# Altium PCB TallyLight2.PcbDoc
Units mm, origin at the board's own origin, x right, y up, seen from the top; angles counter-clockwise.
Board outline 66 x 74 mm, 2 copper layers (Top Layer, Bottom Layer), stack 1.571 mm thick; 19 components, 15 nets, 83 pads, 7 vias.
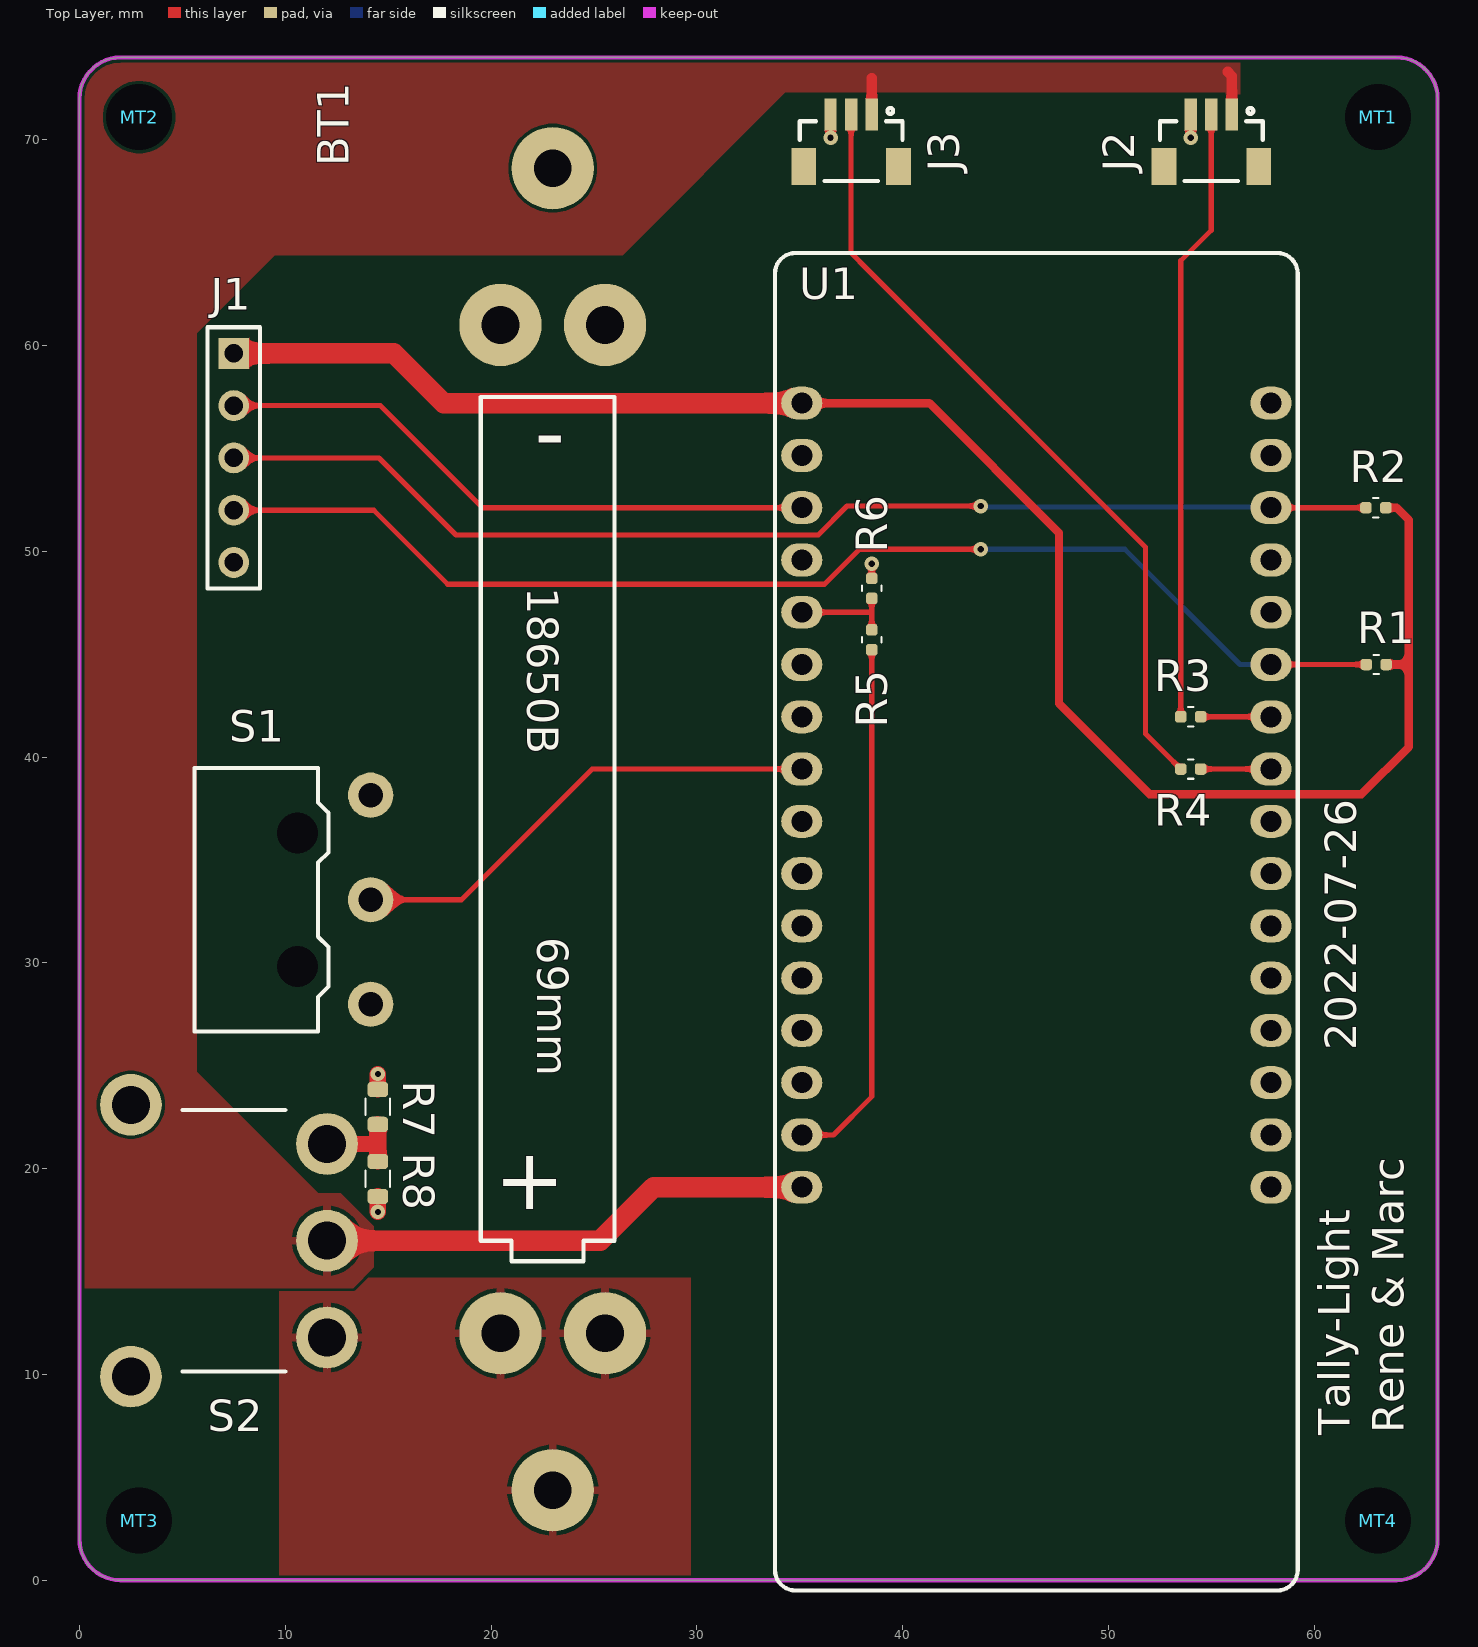
[diagram p0: Top Layer view]
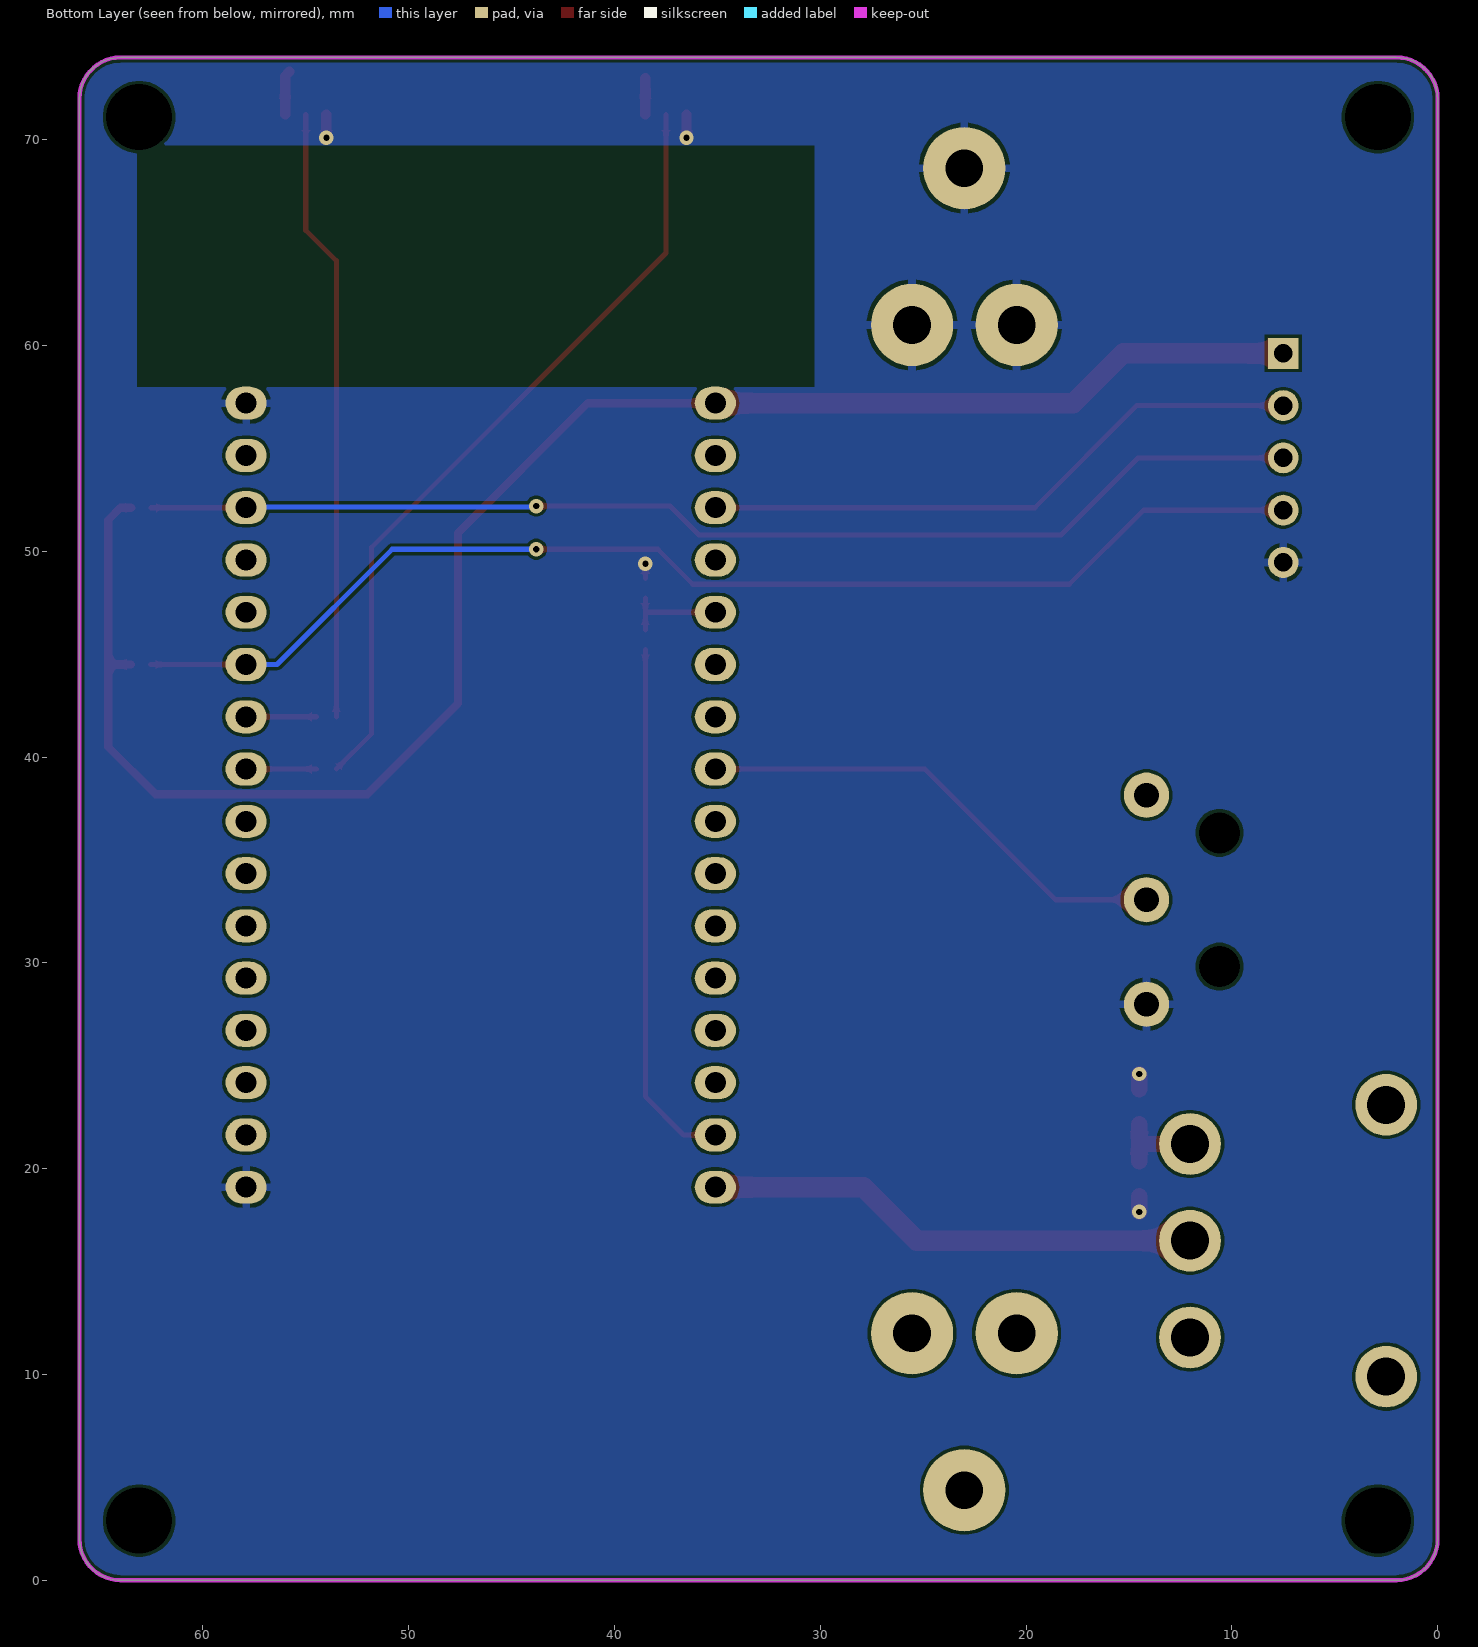
[diagram p1: Bottom Layer view, seen from below]

## Layer stack, top to bottom
Top Solder: solder mask 0.0102, Solder Resist, Dk 3.5
Top Layer: signal copper 0.0356
Dielectric 1: dielectric 1.5, FR-4, Dk 4.8
Bottom Layer: signal copper 0.0356
Bottom Solder: solder mask 0.0102, Solder Resist, Dk 3.5

## Board outline
2,0 cw(c2,2) 0,2 0,72 cw(c2,72) 2,74 64,74 cw(c64,72) 66,72 66,2 cw(c64,2) 64,0

## Design rules (kind name [scope] priority, off if disabled: settings)
Clearance [All] p1: gap=0.15 ignorepadtopadclearanceinfootprint=FALSE
HoleSize [All] p1: absolutevalues=TRUE maxlimit=3.5 minlimit=0.025 maxpercent=80.000 minpercent=20.000
MinimumSolderMaskSliver [All] p1 off: minsoldermaskwidth=0.07
PolygonConnect PolygonConnect_1 [isvia] p1: connectstyle=Direct reliefconductorwidth=0.254 reliefentries=4 polygonreliefangle="90 Angle" airgapwidth=0.254
PolygonConnect [All] p2: connectstyle=Relief reliefconductorwidth=0.4 reliefentries=4 polygonreliefangle="90 Angle" airgapwidth=0.2
RoutingVias [All] p1: holewidth=0.3 width=0.7 viastyle="Through Hole" minholewidth=0.3 minwidth=0.7 maxholewidth=0.3 maxwidth=0.7
SilkToSilkClearance [All] p1: silktosilkclearance=0.1
SilkToSolderMaskClearance [IsPad] p1: minsilkscreentomaskgap=0.1 clearancetoexposedcopper=TRUE
SolderMaskExpansion [All] p1: expansion=0.1 istentingtop=FALSE
Width [All] p1: maxlimit=1 minlimit=0.15 preferedwidth=0.25
26 further rules are at their usual default settings.

## Components (designator, comment, footprint, x,y, rotation, side; value= is the part's Value field where it differs from the comment)
BT1 "Battery" BAT18650B 23,36.5 r180 top locked
J1 "Header 5" HDR1X5 7.5,59.62 r270 top
J2 "BM03B-SRSS-TB" BM03B-SRSS-TB 55,68 r180 top
J3 "BM03B-SRSS-TB" BM03B-SRSS-TB 37.5,68 r180 top
MT1 "Mount 3.2mm" MT 63.1,71.1 r0 top
MT2 "Mount 3.2mm" MT 2.9,71.1 r0 top
MT3 "Mount 3.2mm" MT 2.9,2.9 r0 top
MT4 "Mount 3.2mm" MT 63.1,2.9 r0 top
R1 "1.5k" R0402 63.017,44.5 r0 top
R2 "1.5k" R0402 63,52.12 r0 top
R3 "470E" R0402 54,41.96 r0 top
R4 "470E" R0402 54,39.42 r0 top
R5 "10k" R0402 38.5,45.7 r270 top
R6 "20k" R0402 38.5,48.2 r270 top
R7 "10E" R0603 14.5,23 r270 top
R8 "10E" R0603 14.5,19.5 r90 top
S1 "SS075Q102F035V2A" SS075Q102F035V2A 0.8,41.87 r0 top
S2 "500SSP1S2M6REA" 500SSPxS2M6xEA 2.5,16.5 r0 top locked
U1 "LolinD32Pro" LolinD32Pro 46.5,-0.5 r0 top locked

## Footprints (in the part's own frame and the unit in brackets; to place one, negate y for a bottom-side part, rotate by r counter-clockwise, add the part's x,y. Pads: shape width x height; smd on the part's side, far side on the other; paste and mask are expansions set on the pad)
500SSPxS2M6xEA [mm]
  round 3 hole 1.85: 0(0,-6.605) 0(0,6.605) 1(9.53,4.7) 2(9.53,0) 3(9.53,-4.7)
  silkscreen extent 2.5,-6.35 7.5,6.35, body extent -8.25,-6.79 10.16,6.79, height 6.6
BAT18650B [mm]
  round 4 hole 1.83: 1(-2.54,24.5) 1(0,32.12) 1(2.54,24.5) 2(-2.54,-24.5) 2(0,-32.12) 2(2.54,-24.5)
  silkscreen extent -3,-21 3.5,21, body extent -9.15,-35.51 9.15,35.51, height 18.65
BM03B-SRSS-TB [mm]
  rect 1.2x1.8 smd: 0(-2.3,-0.7) 0(2.3,-0.7)
  rect 0.6x1.55 smd: 1(-1,-3.225) 2(0,-3.225) 3(1,-3.225)
  silkscreen extent -2.5,-3.54 2.5,0, body extent -2.5,-3.6 2.5,0, height 4.25
HDR1X5 [mm] "Connector; Header; 5 Position"
  rect 1.5x1.5 hole 0.9: 1(0,0)
  round 1.5 hole 0.9: 2(2.54,0) 3(5.08,0) 4(7.62,0) 5(10.16,0)
  silkscreen extent -1.27,-1.27 11.43,1.27
LolinD32Pro [mm]
  oval 2x1.6 hole 1.02: A1(-11.4,57.7) A2(-11.4,55.16) A3(-11.4,52.62) A4(-11.4,50.08) A5(-11.4,47.54) A6(-11.4,45) A7(-11.4,42.46) A8(-11.4,39.92) A9(-11.4,37.38) A10(-11.4,34.84) A11(-11.4,32.3) A12(-11.4,29.76) A13(-11.4,27.22) A14(-11.4,24.68) A15(-11.4,22.14) A16(-11.4,19.6) B1(11.4,57.7) B2(11.4,55.16) B3(11.4,52.62) B4(11.4,50.08) B5(11.4,47.54) B6(11.4,45) B7(11.4,42.46) B8(11.4,39.92) B9(11.4,37.38) B10(11.4,34.84) B11(11.4,32.3) B12(11.4,29.76) B13(11.4,27.22) B14(11.4,24.68) B15(11.4,22.14) B16(11.4,19.6)
  silkscreen extent -12.7,0 12.7,65, body extent -12.7,0 12.7,65, height 17.5
MT [mm]
  round 0 hole 3.2 unplated: 15(0,0)
R0402 [mil] "R0402"
  rrect50% 22x22 smd: 1(-19,0) 2(19,0)
  silkscreen extent -5,-19 5,19, body extent -20,-10 20,10, height 12
R0603 [mm] "C0603"
  rrect50% 0.75x1 smd: 1(-0.85,0) 2(0.85,0)
  silkscreen extent -0.4,-0.6 0.4,0.6, body extent -0.8,-0.4 0.8,0.4, height 0.45
SS075Q102F035V2A [mm]
  round 2.2 hole 1.2: 1(13.35,-13.88) 2(13.35,-8.8) 3(13.35,-3.72)
  round 0 hole 2: 14(9.8,-12.05) 14(9.8,-5.55)
  silkscreen extent 4.8,-15.2 11.3,-2.4, body extent 1.78,-15.22 13.5,1.88, height 5.77

## Part data
BT1: "Multicell Battery", LatestRevisionDate=17-Jul-2002, LatestRevisionNote="Re-released for DXP Platform.", PackageDescription="Battery; 2 Leads", PackageReference=BAT-2, Published=24-Mar-1999, Publisher="Altium Limited"
J1: "Header, 5-Pin", LatestRevisionDate=17-Jul-2002, LatestRevisionNote="Re-released for DXP Platform.", Publisher="Altium Limited"
J2 J3: library part "Header 3", "Header, 3-Pin", LatestRevisionDate=17-Jul-2002, LatestRevisionNote="Re-released for DXP Platform.", Publisher="Altium Limited"
MT1 MT2 MT3 MT4: library part MountingHole, "Mounting hole 3.2mm, 5.7mm pad", Fitted="Not Fitted"
R1 R2 R3 R4 R5 R6 R7 R8: library part "RES 0402", "RES 200 KOHM 1/10W 1% 0402 SMD", Manufacturer=Panasonic, Manufacturer Part Number=ERJ-2RKF2003X, Fitted=Fitted
S1: library part SW-PB, "Switch", LatestRevisionDate=17-Jul-2002, LatestRevisionNote="Re-released for DXP Platform.", PackageDescription="Switch; 2 Leads", PackageReference=SPST-2, Published=24-Mar-1999, Publisher="Altium Limited"
S2: library part SW-SPDT, "SPDT Subminiature Toggle Switch, Right Angle Mounting, Vertical Actuation", ComponentLink1Description="Manufacturer Link", ComponentLink1URL=http://www.apem.com, DatasheetVersion=05-Dec-2000, LatestRevisionDate=17-Dec-2003, LatestRevisionNote="Schematic revised, PCB Footprint replaced.", PackageDescription="Switch; 4 Leads", PackageReference=TL36WW15050, Published=24-Mar-1999, Publisher="Altium Limited"

## Via types
v1: diameter 0.7, hole 0.3, Top Layer to Bottom Layer, tented top, 7 vias

## Nets (pads, with @x,y where several pads share a name; then routed paths per layer and width w, separated by ;. In a path a pad name is that pad's centre, name@x,y a point inside that pad or via, vN(x,y) a via of type N, cw(c..) or ccw(c..) an arc to the next point about the centre after c; other vN are vias at no path point)
+3.3V: J1.1 R1.2 R2.2 U1.A1 | length 85.3
  Top Layer w0.4: U1.A1 41.3,57.2 47.6,50.9 47.6,42.6 52,38.2 62.3,38.2 64.6,40.5 64.6,44.5 ; R2.2 64.001,52.12 64.6,51.521 64.6,44.5 ; R1.2 64.6,44.5
  Top Layer w1: J1.1 15.28,59.62 17.7,57.2 U1.A1
GND: BT1.2 J1.5 J2.3 J3.3 R6.1 R7.1 R8.1 S1.1 U1.B1 U1.B16 | length 4.5
  Top Layer w0.25: R6.1 v1(38.5,49.4)
  Top Layer w0.5: v1(36.5,70.1) J3.3 ; v1(54,70.1) J2.3
  Top Layer w0.8: v1(14.5,17.9) R8.1 ; R7.1 v1(14.5,24.6)
NetBT1_1: BT1.1 S2.3
NetJ1_2: J1.2 U1.A3 | length 29.7
  Top Layer w0.25: J1.2 14.62,57.08 19.58,52.12 U1.A3
NetJ1_3: J1.3 R2.1 U1.B3 | length 57.2
  Top Layer w0.25: J1.3 14.56,54.54 18.3,50.8 35.9,50.8 37.3,52.2 v1(43.8,52.2) ; U1.B3 R2.1
  Bottom Layer w0.25: v1(43.8,52.2) 43.84,52.16 57.86,52.16 U1.B3
NetJ1_4: J1.4 R1.1 U1.B6 | length 59.5
  Top Layer w0.25: J1.4 14.3,52 17.9,48.4 36.2,48.4 37.9,50.1 v1(43.8,50.1) ; U1.B6 R1.1
  Bottom Layer w0.25: v1(43.8,50.1) 50.8,50.1 56.4,44.5 U1.B6
NetJ2_2: J2.2 R3.1 | length 29.9
  Top Layer w0.25: R3.1 53.517,64.117 55,65.6 J2.2
NetJ3_2: J3.2 R4.1 | length 38.4
  Top Layer w0.25: J3.2 37.5,64.5 38.3,63.7 51.8,50.2 51.8,41.137 R4.1
NetR3_2: R3.2 U1.B7 | length 3.4
  Top Layer w0.25: R3.2 U1.B7
NetR4_2: R4.2 U1.B8 | length 3.4
  Top Layer w0.25: R4.2 U1.B8
NetR5_2: R5.2 U1.A15 | length 25.9
  Top Layer w0.25: U1.A15 36.64,21.64 38.5,23.5 R5.2
NetR7_2: R7.2 R8.2 S2.1 | length 4.3
  Top Layer w0.8: S2.1 14.45,21.2 14.5,21.25 ; R8.2 14.5,21.25 ; R7.2 14.5,21.25
NetS1_2: S1.2 U1.A8 | length 23.6
  Top Layer w0.25: S1.2 18.57,33.07 24.92,39.42 U1.A8
VBAT_SW: J2.1 J3.1 S2.2 U1.A16 | length 28.1
  Top Layer w0.5: J3.1 38.5,73 ; 55.8,73.3 56,73.1 J2.1
  Top Layer w1: S2.2 25.3,16.5 27.9,19.1 U1.A16
VBUS_Mon: R5.1 R6.2 U1.A5 | length 5
  Top Layer w0.25: U1.A5 38.41,47.04 38.5,46.95 ; R5.1 38.5,46.95 ; R6.2 38.5,46.95
pads on no net: J2.0 J3.0 MT1.15 MT2.15 MT3.15 MT4.15 S1.3 S1.14 S2.0 U1.A2 U1.A4 U1.A6 U1.A7 U1.A9 U1.A10 U1.A11 U1.A12 U1.A13 U1.A14 U1.B2 U1.B4 U1.B5 U1.B9 U1.B10 U1.B11 U1.B12 U1.B13 U1.B14 U1.B15

## Polygon pours and split planes (outlines as drawn)
VBAT_SW on Top Layer "VBAT_SW_L01_P000" (solid, pour order 0): 11.6,18.8 12.7,18.8 14.3,17.2 14.3,15.2 13.3,14.2 0,14.2 0,73 1,74 56.4,74 56.4,72 56.2,71.8 55.8,71.8 55.7,71.9 55.7,72.3 34.3,72.3 26.4,64.4 9.5,64.4 5.7,60.6 5.7,24.7
NetBT1_1 on Top Layer "NETBT1_1_L01_P001" (solid, pour order 1): 9.7,14.7 29.7,14.7 29.7,0 9.7,0
GND on Bottom Layer "GND_L02_P002" (solid, pour order 2): 0,72.6 1.4,74 65,74 66,73 66,1.1 64.9,0 1.3,0 0,1.3

## Keep-outs
Keep-Out Layer:
  the board outline again, w0.2

## Other copper
Bottom Layer:
  pour cut-out: 30.3,58 63.2,58 63.2,69.7 30.3,69.7

## Silkscreen, mask and mechanical layers (free items; w line width, h text height)
Top Overlay:
  text "2022-07-26" at 62.046,25.754 h1.52 r90
  text "Rene & Marc" at 64.346,7.154 h1.52 r90
  text "Tally-Light" at 61.738,7.054 h1.52 r90
Mechanical 1:
  lines w0.2: -2.1,3 -2.1,50 ; -0.5,4 -0.5,45 ; 32.5,58 60.5,58 60.5,70.5 32.5,70.5 32.5,58
Drill Drawing:
  circle w0.254: c82.421,15.181 r0.847
  lines w0.2: 0,2 ccw(c2,2) 2,0 64,0 ccw(c64,2) 66,2 66,72 ccw(c64,72) 64,74 2,74 ccw(c2,72) 0,72 0,2
  lines w0.254: 81.574,8.407 83.268,8.407 82.421,6.714 81.574,8.407 ; 81.574,10.524 81.574,10.947 81.998,11.371 81.574,11.794 81.574,12.217 81.998,12.217 82.421,11.794 82.844,12.217 83.268,12.217 83.268,11.794 82.844,11.371 83.268,10.947 83.268,10.524 82.844,10.524 82.421,10.947 81.998,10.524 81.574,10.524 ; 81.574,18.144 82.421,18.567 83.268,18.144 82.844,18.991 83.268,19.837 82.421,19.414 81.574,19.837 81.998,18.991 81.574,18.144 ; 81.574,22.377 81.998,22.377 81.998,21.954 82.844,21.954 82.844,22.377 83.268,22.377 83.268,23.224 82.844,23.224 82.844,23.647 81.998,23.647 81.998,23.224 81.574,23.224 81.574,22.377 ; 81.574,26.187 81.998,26.187 82.421,25.764 82.844,26.187 83.268,26.187 82.844,26.611 83.268,27.034 82.844,27.034 82.421,27.457 81.998,27.034 81.574,27.034 81.998,26.611 81.574,26.187 ; 81.574,29.574 83.268,29.574 83.268,31.267 81.574,31.267 81.574,29.574 ; 81.574,34.231 82.421,33.384 83.268,34.231 82.421,35.077 81.574,34.231
  lines w0.381: 80.056,5.571 267.507,5.571 ; 80.056,36.051 267.507,36.051 ; 94.048,1.761 94.048,39.861 ; 107.76,1.761 107.76,39.861 ; 136.962,1.761 136.962,39.861 ; 149.811,1.761 149.811,39.861 ; 168.45,1.761 168.45,39.861 ; 206.538,1.761 206.538,39.861 ; 221.52,1.761 221.52,39.861 ; 240.464,1.761 240.464,39.861 ; 80.056,1.761 267.507,1.761 267.507,39.861 80.056,39.861 80.056,1.761
  text "Symbol" at 82.342,37.194 h1.83
  text "Count" at 95.191,37.194 h1.83
  text "Hole Size" at 108.903,37.194 h1.83
  text "Plated" at 138.105,37.194 h1.83
  text "Hole Type" at 150.954,37.194 h1.83
  text "Drill Layer Pair" at 169.593,37.194 h1.83
  text "Via/Pad" at 207.681,37.194 h1.83
  text "Pad Shape" at 222.663,37.194 h1.83
  text "Template" at 241.607,37.194 h1.83
  text "7" at 95.191,33.384 h1.52
  text "11.81mil (0.300mm)" at 108.903,33.384 h1.52
  text "PTH" at 138.105,33.384 h1.52
  text "Round" at 150.954,33.384 h1.52
  text "Top Layer - Bottom Layer" at 169.593,33.384 h1.52
  text "Via" at 207.681,33.384 h1.52
  text "Rounded" at 222.663,33.384 h1.52
  text "v70h30m0" at 241.607,33.384 h1.52
  text "5" at 95.191,29.574 h1.52
  text "35.43mil (0.900mm)" at 108.903,29.574 h1.52
  text "PTH" at 138.105,29.574 h1.52
  text "Round" at 150.954,29.574 h1.52
  text "Top Layer - Bottom Layer" at 169.593,29.574 h1.52
  text "Pad" at 207.681,29.574 h1.52
  text "(Mixed)" at 222.663,29.574 h1.52
  text "(Mixed)" at 241.607,29.574 h1.52
  text "32" at 95.191,25.764 h1.52
  text "40.16mil (1.020mm)" at 108.903,25.764 h1.52
  text "PTH" at 138.105,25.764 h1.52
  text "Round" at 150.954,25.764 h1.52
  text "Top Layer - Bottom Layer" at 169.593,25.764 h1.52
  text "Pad" at 207.681,25.764 h1.52
  text "Rounded" at 222.663,25.764 h1.52
  text "r200_160h102r100" at 241.607,25.764 h1.52
  text "3" at 95.191,21.954 h1.52
  text "47.24mil (1.200mm)" at 108.903,21.954 h1.52
  text "PTH" at 138.105,21.954 h1.52
  text "Round" at 150.954,21.954 h1.52
  text "Top Layer - Bottom Layer" at 169.593,21.954 h1.52
  text "Pad" at 207.681,21.954 h1.52
  text "Rounded" at 222.663,21.954 h1.52
  text "c220h120" at 241.607,21.954 h1.52
  text "6" at 95.191,18.144 h1.52
  text "72.05mil (1.830mm)" at 108.903,18.144 h1.52
  text "PTH" at 138.105,18.144 h1.52
  text "Round" at 150.954,18.144 h1.52
  text "Top Layer - Bottom Layer" at 169.593,18.144 h1.52
  text "Pad" at 207.681,18.144 h1.52
  text "Rounded" at 222.663,18.144 h1.52
  text "c400h183" at 241.607,18.144 h1.52
  text "5" at 95.191,14.334 h1.52
  text "72.84mil (1.850mm)" at 108.903,14.334 h1.52
  text "PTH" at 138.105,14.334 h1.52
  text "Round" at 150.954,14.334 h1.52
  text "Top Layer - Bottom Layer" at 169.593,14.334 h1.52
  text "Pad" at 207.681,14.334 h1.52
  text "Rounded" at 222.663,14.334 h1.52
  text "c300h185" at 241.607,14.334 h1.52
  text "2" at 95.191,10.524 h1.52
  text "78.74mil (2.000mm)" at 108.903,10.524 h1.52
  text "PTH" at 138.105,10.524 h1.52
  text "Round" at 150.954,10.524 h1.52
  text "Top Layer - Bottom Layer" at 169.593,10.524 h1.52
  text "Pad" at 207.681,10.524 h1.52
  text "Rounded" at 222.663,10.524 h1.52
  text "c0h200" at 241.607,10.524 h1.52
  text "4" at 95.191,6.714 h1.52
  text "125.98mil (3.200mm)" at 108.903,6.714 h1.52
  text "NPTH" at 138.105,6.714 h1.52
  text "Round" at 150.954,6.714 h1.52
  text "Top Layer - Bottom Layer" at 169.593,6.714 h1.52
  text "Pad" at 207.681,6.714 h1.52
  text "Rounded" at 222.663,6.714 h1.52
  text "c0hn320" at 241.607,6.714 h1.52
  text "64 Total" at 95.191,2.904 h1.52
Mechanical 31:
  text ".Printout_Name" at 2.3,93.5 h1.2
  text ".Pcb_File_Name_No_Path" at 2.3,89.5 h1.2
  text "Designer:" at 2.3,85.5 h1.2
  text "Marc Andre" at 17.3,85.5 h1.2
  text "Marc Andre" at 38.3,85.5 h1.2
  text "Date:" at 2.3,83.5 h1.2
  text ".print_Date" at 17.3,83.5 h1.2
  text "Jurablickstr. 36" at 38.3,83.5 h1.2
  text "CH-3095 Spiegel" at 38.3,81.5 h1.2
  text "Switzerland" at 38.3,79.5 h1.2

## Dimensions
64,0 to 64,74 on Drill Drawing
0,2 to 66,2 on Drill Drawing

## Text inside footprints (layer, text, board x,y; h text height)
BT1: Top Overlay "-" at 23.6,56.6 h3 r180; Top Overlay "+" at 23.6,20.6 h3 r180; Top Overlay "69mm" at 22.254,31.246 h1.52 r270; Top Overlay "18650B" at 21.754,48.246 h1.52 r270
S1: Mechanical 13 "PT" at 0.921,37.499 h1.52 r90; Mechanical 13 "OP" at 2.679,40.999 h1.52